# EAGLE board krajBB-Mojžiš_Matej6 (EAGLE 7.7.0)
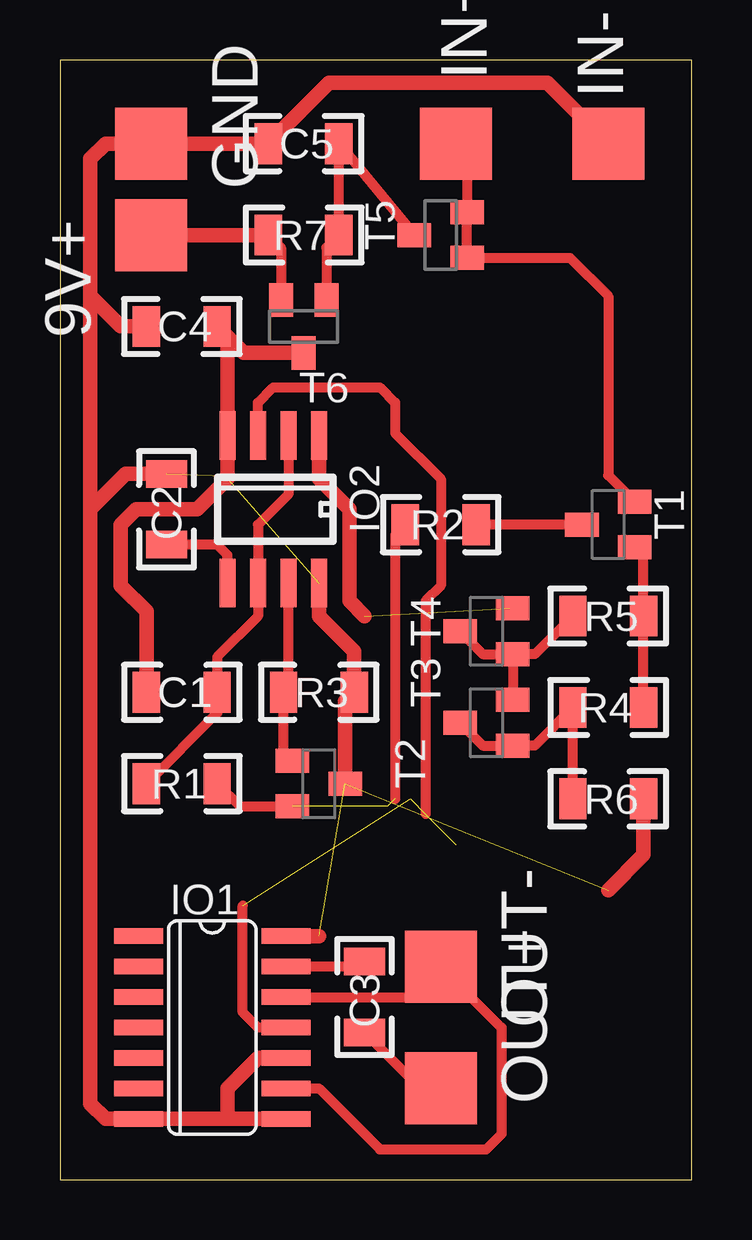
[diagram p0: board, top side]

Size 26.34 x 46.66 mm. Coordinates in mm from the lower left corner, seen from the top.
Outline: 0,0 26.34,0 26.34,46.66 0,46.66 0,0
Copper layers (1*16): Top 0.035mm / dielectric 1.5mm / Bottom 0.035mm
Design rules "default *": minimum track width 10mil, minimum drill 24mil, track to track 8mil, track to pad 8mil, pad to pad 8mil, via to via 8mil, smd to smd 8mil, copper to edge 16mil, drill to drill 8mil, minimum pad ring 10mil, minimum via ring 8mil, stop-mask expansion 4mil, vias tented up to drill 0mil, thermal gap 10mil

## Footprints (pad centres in the part's own frame; a part is rotated, then mirrored left to right if it is on the bottom)
SMD3X3 = smd 3 x 3: P$1 0,0
1206 = smd 1.143 x 1.702: 1 -1.473,0; 2 1.473,0
SO14 = smd 0.66 x 2.032: 1 -3.81,-3.073; 2 -2.54,-3.073; 3 -1.27,-3.073; 4 0,-3.073; 5 1.27,-3.073; 6 2.54,-3.073; 7 3.81,-3.073; 8 3.81,3.073; 9 2.54,3.073; 10 1.27,3.073; 11 0,3.073; 12 -1.27,3.073; 13 -2.54,3.073; 14 -3.81,3.073
SO08 = smd 0.66 x 2.032: 1 -1.905,-3.073; 2 -0.635,-3.073; 3 0.635,-3.073; 4 1.905,-3.073; 5 1.905,3.073; 6 0.635,3.073; 7 -0.635,3.073; 8 -1.905,3.073
LD-DR-3519 = drill 1 pad 1.93 long: P$1 -3,-15; P$2 3,-15
SOT23-BEC = smd 1 x 1.4: B -0.95,-1.1; C 0,1.1; E 0.95,-1.1
SOT23 = smd 1 x 1.4: 1 -0.95,-1.1; 2 0.95,-1.1; 3 0,1.1

## Placement (x,y rotation side)
9V+  SMD3X3  [SMD3X3]  3.81,39.37 270 top
C1  1u  [1206]  5.08,20.32 180 top
C2  1u  [1206]  4.45,27.94 270 top
C3  1u  [1206]  12.7,7.62 270 top
C4  1u  [1206]  5.08,35.56 0 top
C5  1u  [1206]  10.16,43.18 0 top
GND  SMD3X3  [SMD3X3]  3.81,43.18 90 top
IN+  SMD3X3  [SMD3X3]  16.51,43.18 270 top
IN-  SMD3X3  [SMD3X3]  22.86,43.18 90 top
IO1  4013D  [SO14]  6.35,6.35 270 top
IO2  NE555D  [SO08]  8.89,27.94 180 top
OUT+  SMD3X3  [SMD3X3]  15.88,3.81 90 top
OUT-  SMD3X3  [SMD3X3]  15.88,8.89 90 top
R1  100  [1206]  5.08,16.51 180 top
R2  470  [1206]  15.88,27.3 180 top
R3  10k  [1206]  10.79,20.32 0 top
R4  10k  [1206]  22.86,19.68 180 top
R5  2.2k  [1206]  22.86,23.5 0 top
R6  47k  [1206]  22.86,15.88 0 top
R7  10M  [1206]  10.16,39.37 180 top
REPRODUKTOR  LD-DR-3519  [LD-DR-3519]  76.83,23.5 0 top  (outside the outline)
T1  BC817-25  [SOT23-BEC]  22.86,27.3 90 top
T2  BC817-25  [SOT23-BEC]  10.79,16.51 270 top
T3  BC817-25  [SOT23-BEC]  17.78,19.05 90 top
T4  BC817-25  [SOT23-BEC]  17.78,22.86 90 top
T5  BSS84  [SOT23]  15.88,39.37 90 top
T6  BSS84  [SOT23]  10.16,35.56 180 top
U$1  9VBATTERY  [9VBATTERY]  78.11,22.86 0 top  (outside the outline)

## Library data of the parts
9V+ GND IN+ IN- OUT+ OUT- = solpad
C1-C5 R1-R7 = rcl
IO1 = 40xx
IO2 = linear
REPRODUKTOR = buzzer
T1-T4 = transistor-npn
T5 T6 = transistor-small-signal
U$1 = battery

## Nets
9V_1: R4.2 R6.1 T3.B T3.C
9V_2: R5.1 T3.E T4.B T4.C
+9V: C1.2 C4.2 IO1.14 IO2.4 IO2.8 R3.2 R6.2 T2.C T6.3
CLOCK: IO1.11 IO2.3
CV: C2.2 IO2.5
DIS: IO2.7 R3.1 T2.B
DIS_1: R2.1 T1.C
DIS_IN: R1.1 R2.2 T2.E
DIV: R4.1 R5.2 T1.B
GND: C2.1 C4.1 C5.1 GND.P$1 IN-.P$1 IO1.7 IO1.8 IO1.10 IO2.1 T4.E
IN: IN+.P$1 T1.E T5.1 T5.2
MOS: C5.2 R7.1 T5.3 T6.1
OUT: C3.1 IO1.13
REP: C3.2 OUT+.P$1
REP+: IO1.9 IO1.12 OUT-.P$1
THR: C1.1 IO2.2 IO2.6 R1.2
VIN: 9V+.P$1 R7.2 T6.2

## Tracks (layer width: path | path; a pad name or v marks a point on that pad's centre or on a via)
9V_1
  Top 0.406: T3.C 17.63,18.1 T3.B 19.8,18.1 R4.2 R6.1
9V_2
  Top 0.406: R5.1 19.8,21.91 T4.B | T4.C 17.63,21.91 T4.B | T4.B T3.E
+9V  (3 unrouted)
  Top 0.61: IO1.14 10.79,10.16 | T6.3 7.65,34.46 C4.2 6.99,35.13 IO2.4 6.99,29.21 5.71,27.94 3.17,27.94 2.54,27.3 2.54,24.77 3.61,23.7 C1.2 | IO2.8 10.79,23.5 12.27,22.02 R3.2 11.89,19.95 T2.C | R6.2 24.33,13.54 22.86,12.06
CLOCK  (3 unrouted)
  Top 0.406: IO1.11 8.26,6.35 7.62,6.99 7.62,11.43 | IO2.3 8.26,32.38 8.89,33.02 13.34,33.02 13.97,32.38 13.97,31.11 15.88,29.21 15.88,24.77 15.24,24.13 15.24,15.24
CV
  Top 0.406: IO2.5 6.99,26.04 6.55,26.47 C2.2
DIS
  Top 0.406: IO2.7 9.53,20.52 R3.1 9.32,17.83 T2.B
DIS_1
  Top 0.406: T1.C R2.1
DIS_IN  (2 unrouted)
  Top 0.406: R1.1 7.5,15.56 T2.E | R2.2 13.97,26.87 13.97,15.88
DIV
  Top 0.406: 24.33,19.23 R4.1 R5.2 24.33,25.98 T1.B
GND  (2 unrouted)
  Top 0.61: IO1.8 6.99,2.54 | 6.99,2.54 IO1.7 1.91,2.54 1.27,3.17 1.27,26.67 1.27,27.94 | IO1.10 8.26,5.08 6.99,3.81 6.99,2.54 | C2.1 2.74,29.41 1.27,27.94 | 18.73,23.81 T4.E | C4.1 2.54,35.56 1.27,36.83 | 1.27,36.83 1.27,42.55 1.91,43.18 GND.P$1 C5.1 11.23,45.72 20.32,45.72 IN-.P$1 | IO2.1 10.79,29.21 12.06,27.94 12.06,24.13 12.7,23.5 | 1.27,36.83 1.27,27.94
IN
  Top 0.406: IN+.P$1 16.98,42.72 T5.2 T5.1 21.27,38.42 22.86,36.83 22.86,29.36 T1.E
MOS
  Top 0.406: 14.81,39.34 T5.3 C5.2 R7.1 11.11,38.85 T6.1
OUT
  Top 0.406: C3.1 12.5,8.89 IO1.13
REP
  Top 0.406: C3.2 15.04,3.81 OUT+.P$1
REP+
  Top 0.406: IO1.12 14.61,7.62 OUT-.P$1 18.41,6.35 18.41,1.91 17.78,1.27 13.34,1.27 10.79,3.81 IO1.9
THR
  Top 0.406: IO2.2 9.53,28.57 8.26,27.3 IO2.6 8.26,23.5 6.55,21.79 C1.1 6.55,19.46 R1.2
VIN
  Top 0.406: R7.2 9.21,38.85 T6.2
  Top 0.61: 9V+.P$1 R7.2